# Altium PCB PCMCIA_1.PcbDoc
Units mil, origin at the board's own origin, x right, y up, seen from the top; angles counter-clockwise.
Board outline 6000 x 4000 mil, 2 copper layers (Top Layer, Bottom Layer); 3 components, 48 nets, 170 pads, 14 vias.
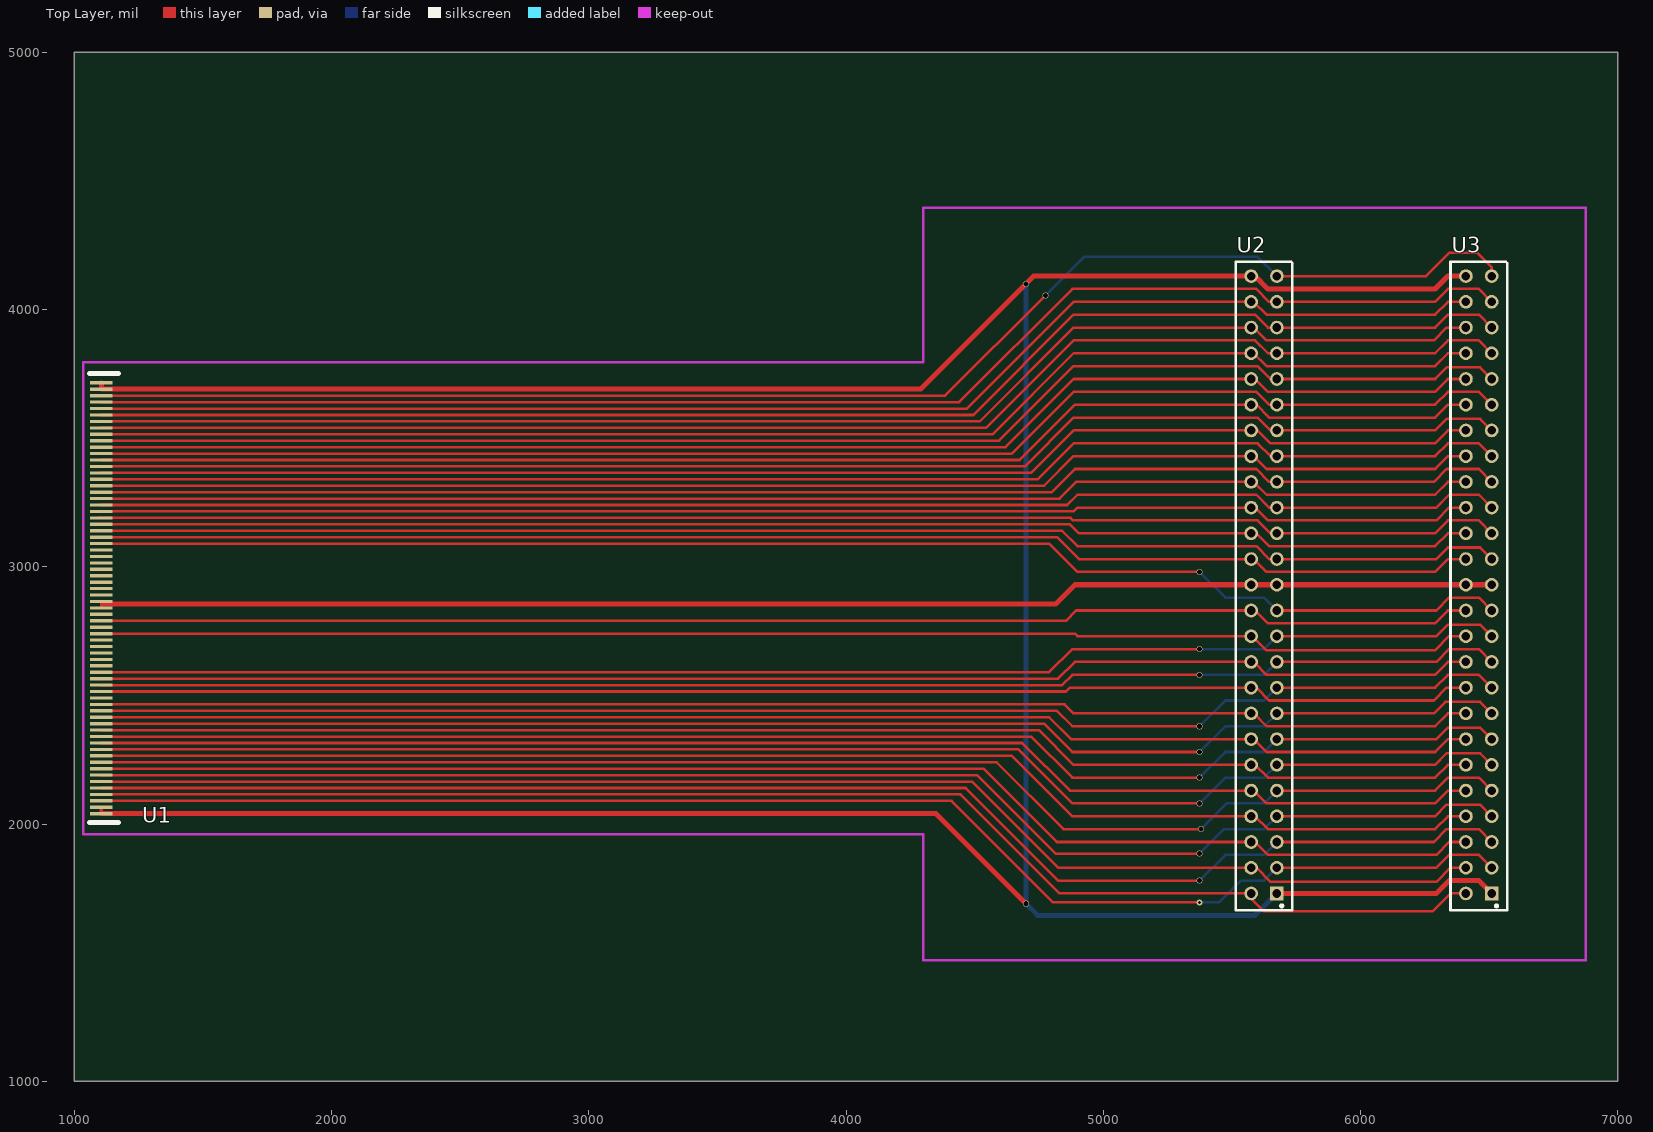
[diagram p0: Top Layer view]
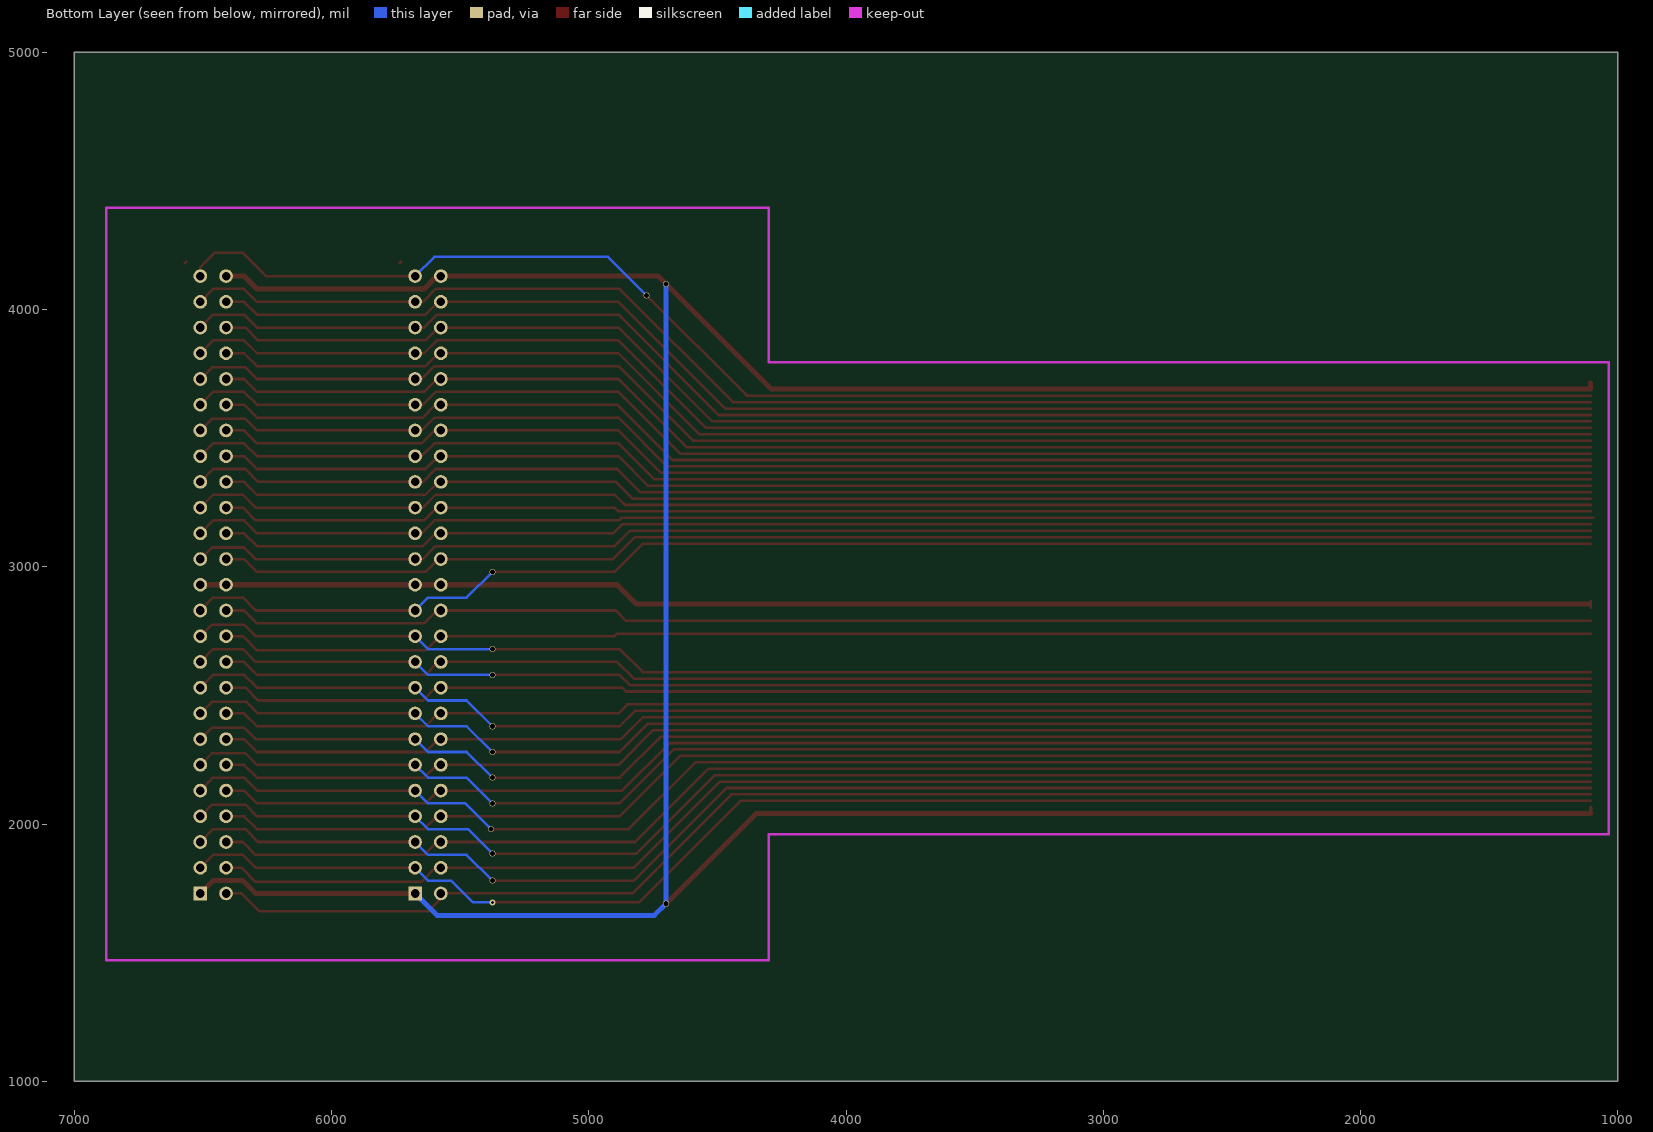
[diagram p1: Bottom Layer view, seen from below]

## Layer stack, top to bottom
Top Layer: signal copper 1.4
Dielectric: dielectric 12.6, FR-4, Dk 4.8
Bottom Layer: signal copper 1.4

## Board outline
1000,1000 7000,1000 7000,5000 1000,5000

## Design rules (kind name [scope] priority, off if disabled: settings)
Clearance [All] p1: gap=10
ComponentClearance [All] p1: gap=10 collisioncheckmode=3 verticalgap=10
HoleSize [All] p1: absolutevalues=TRUE maxlimit=35.43 minlimit=3.94 maxpercent=80.000 minpercent=20.000
PolygonConnect [All] p1: connectstyle=Relief reliefconductorwidth=10 reliefentries=4 polygonreliefangle="90 Angle"
RoutingVias [All] p1: holewidth=11.81 width=31.5 viastyle="Through Hole" minholewidth=3.94 minwidth=21.65 maxholewidth=19.68 maxwidth=23.62
SolderMaskExpansion [All] p1: expansion=4
TestPointUsage [All] p1: valid=0 allowmultiple=FALSE
Testpoint [All] p1: side=15 testpointundercomponent=TRUE minsize=40 maxsize=100 preferedsize=60 minholesize=0 maxholesize=40 preferedholesize=32 testpointgrid=1 style=1023 order=0-112345678
Width [All] p1: maxlimit=20 minlimit=10 preferedwidth=10
17 further rules are at their usual default settings.

## Components (designator, comment, footprint, x,y, rotation, side; value= is the part's Value field where it differs from the comment)
U1 "" PCMCIA_68pin_F 1105,2040 r180 top
U2 "" DIP40_600MIL 5375,2680 r180 top
U3 "" DIP40_600MIL 6210,2680 r180 top

## Footprints (in the part's own frame and the unit in brackets; to place one, negate y for a bottom-side part, rotate by r counter-clockwise, add the part's x,y. Pads: shape width x height; smd on the part's side, far side on the other; paste and mask are expansions set on the pad)
DIP40_600MIL [mm]
  rect 1.35x1.35 hole 0.85: 1(-7.62,24.13)
  round 1.35 hole 0.85: 2(-7.62,21.59) 3(-7.62,19.05) 4(-7.62,16.51) 5(-7.62,13.97) 6(-7.62,11.43) 7(-7.62,8.89) 8(-7.62,6.35) 9(-7.62,3.81) 10(-7.62,1.27) 11(-7.62,-1.27) 12(-7.62,-3.81) 13(-7.62,-6.35) 14(-7.62,-8.89) 15(-7.62,-11.43) 16(-7.62,-13.97) 17(-7.62,-16.51) 18(-7.62,-19.05) 19(-7.62,-21.59) 20(-7.62,-24.13) 21(-7.62,-26.67) 22(-7.62,-29.21) 23(-7.62,-31.75) 24(-7.62,-34.29) 25(-7.62,-36.83) 26(-5.08,24.13) 27(-5.08,21.59) 28(-5.08,19.05) 29(-5.08,16.51) 30(-5.08,13.97) 31(-5.08,11.43) 32(-5.08,8.89) 33(-5.08,6.35) 34(-5.08,3.81) 35(-5.08,1.27) 36(-5.08,-1.27) 37(-5.08,-3.81) 38(-5.08,-6.35) 39(-5.08,-8.89) 40(-5.08,-11.43) 41(-5.08,-13.97) 42(-5.08,-16.51) 43(-5.08,-19.05) 44(-5.08,-21.59) 45(-5.08,-24.13) 46(-5.08,-26.67) 47(-5.08,-29.21) 48(-5.08,-31.75) 49(-5.08,-34.29) 50(-5.08,-36.83)
  Top Layer lines w0.254: -9.017,-38.227 -9.144,-38.1
  silkscreen extent -9.14,-38.23 -3.56,25.78
PCMCIA_68pin_F [mil]
  rect 86.61x12.5 smd: 1(0,0) 1(0,0) 2(0,-50) 3(0,-100) 4(0,-150) 5(0,-200) 6(0,-250) 7(0,-300) 8(0,-350) 9(0,-400) 10(0,-450) 11(0,-500) 12(0,-550) 13(0,-600) 14(0,-650) 15(0,-700) 16(0,-750) 17(0,-800) 18(0,-850) 19(0,-900) 20(0,-950) 21(0,-1000) 22(0,-1050) 23(0,-1100) 24(0,-1150) 25(0,-1200) 26(0,-1250) 27(0,-1300) 28(0,-1350) 29(0,-1400) 30(0,-1450) 31(0,-1500) 32(0,-1550) 33(0,-1600) 34(0,-1650) 35(0,-25) 35(0,-25) 36(0,-75) 37(0,-125) 38(0,-175) 39(0,-225) 40(0,-275) 41(0,-325) 42(0,-375) 43(0,-425) 44(0,-475) 45(0,-525) 46(0,-575) 47(0,-625) 48(0,-675) 49(0,-725) 50(0,-775) 51(0,-825) 52(0,-875) 53(0,-925) 54(0,-975) 55(0,-1025) 56(0,-1075) 57(0,-1125) 58(0,-1175) 59(0,-1225) 60(0,-1275) 61(0,-1325) 62(0,-1375) 63(0,-1425) 64(0,-1475) 65(0,-1525) 66(0,-1575) 67(0,-1625) 68(0,-1675)
  silkscreen extent -66,-1711 45,35

## Part data
U1: library part Ultrasonic
U2 U3: library part AT89S52_1

## Via types
v1: diameter 23.62, hole 19.68, Top Layer to Bottom Layer, 13 vias
v2: diameter 23.62, hole 11.81, Top Layer to Bottom Layer, 1 vias

## Nets (pads, with @x,y where several pads share a name; then routed paths per layer and width w, separated by ;. In a path a pad name is that pad's centre, name@x,y a point inside that pad or via, vN(x,y) a via of type N, cw(c..) or ccw(c..) an arc to the next point about the centre after c; other vN are vias at no path point)
3.3V: U1.17 U1.51 U2.13 U2.38 U3.13 U3.38 | length 5479.4
  Top Layer w10: U1.17 U1.51 1115,2855 U1.17@1105,2845
  Top Layer w19.68: 1115,2855 4815,2855 4890,2930 U3.13
A0: U1.29 U2.20 U3.20 | length 5566.5
  Top Layer w10: U1.29 4645,3440 4885,3680 5595,3680 5645,3630 6290,3630 6340,3680 6460,3680 U3.20
A1: U1.28 U2.19 U3.19 | length 5541.7
  Top Layer w10: U1.28 4695,3390 4885,3580 5600,3580 5650,3530 6290,3530 6335,3575 6465,3575 U3.19
A2: U1.27 U2.18 U3.18 | length 5525.1
  Top Layer w10: U1.27 4745,3340 4885,3480 5600,3480 5650,3430 6290,3430 6340,3480 6460,3480 U3.18
A3: U1.26 U2.17 U3.17 | length 5504.4
  Top Layer w10: U1.26 4800,3290 4890,3380 5595,3380 5645,3330 6285,3330 6335,3380 6460,3380 U3.17
A4: U1.25 U2.16 U3.16 | length 5483.7
  Top Layer w10: U1.25 4860,3240 4900,3280 5595,3280 5645,3230 6295,3230 6345,3280 6460,3280 U3.16
A5: U1.24 U2.15 U3.15 | length 5481.3
  Top Layer w10: U1.24@1095,3190 4873.23,3190 4883.23,3180 5600,3180 5650,3130 6290,3130 6340,3180 6460,3180 U3.15
A6: U1.23 U2.14 U3.14 | length 5487.8
  Top Layer w10: U1.23 4840,3140 4900,3080 5595,3080 5645,3030 6295,3030 6340,3075 6465,3075 U3.14
A7: U1.22 U2.12 U3.12 | length 5554.1
  Top Layer w10: U1.22 4790,3090 4900,2980 v1(5375,2980) ; U2.12 6295,2830 6345,2880 6460,2880 U3.12
  Bottom Layer w10: v1(5375,2980) 5475,2880 5625,2880 U2.12
A8: U1.12 U2.11 U3.11 | length 5500.3
  Top Layer w10: U1.12 4790,2590 4880,2680 v1(5375,2680) ; U2.11 6295,2730 6340,2775 6465,2775 U3.11
  Bottom Layer w10: v1(5375,2680) 5625,2680 U2.11
A9: U1.11 U2.10 U3.10 | length 5483.7
  Top Layer w10: U1.11 4840,2540 4880,2580 v1(5375,2580) ; U2.10 6295,2630 6345,2680 6460,2680 U3.10
  Bottom Layer w10: v1(5375,2580) 5625,2580 U2.10
A10: U1.8 U2.8 U3.8 | length 5550
  Top Layer w10: U1.8 4770,2390 4880,2280 v1(5375,2280) ; U2.8 6285,2430 6330,2475 6465,2475 U3.8
  Bottom Layer w10: v1(5375,2280) 5475,2380 5625,2380 U2.8
CD1: U1.36 U2.26 U3.26 | length 5554.2
  Top Layer w10: U1.36 4445,2115 4830,1730 U2.26 5575,1710 5625,1660 6280,1660 6350,1730 U3.26@6430,1730
CD2: U1.67 U2.25 U3.25 | length 5754.8
  Top Layer w10: U1.67 4385,3665 v1(4775,4055) ; U2.25 6255,4130 6345,4220 6455,4220 6510,4165 U3.25
  Bottom Layer w10: v1(4775,4055) 4925,4205 5600,4205 U2.25
CS0: U1.7 U2.7 U3.7 | length 5570.7
  Top Layer w10: U1.7 4720,2340 4880,2180 v1(5375,2180) ; U2.7 6295,2330 6340,2375 6465,2375 U3.7
  Bottom Layer w10: v1(5375,2180) 5475,2280 5625,2280 U2.7
CS1: U1.42 U2.32 U3.32 | length 5381.6
  Top Layer w10: U1.42 4790,2415 4875,2330 5585,2330 5635,2280 6290,2280 6340,2330 U3.32
CSLE: U1.56 U2.39 U3.39 | length 5381.6
  Top Layer w10: U1.56 4820,3115 4905,3030 5585,3030 5635,2980 6290,2980 6340,3030 U3.39
D0: U1.30 U2.21 U3.21 | length 5583.1
  Top Layer w10: U1.30 4595,3490 4885,3780 5600,3780 5650,3730 6290,3730 6335,3775 6465,3775 U3.21
D1: U1.31 U2.22 U3.22 | length 5608
  Top Layer w10: U1.31 4545,3540 4885,3880 5590,3880 5640,3830 6290,3830 6340,3880 6460,3880 U3.22
D2: U1.32 U2.23 U3.23 | length 5628.7
  Top Layer w10: U1.32 4495,3590 4885,3980 5590,3980 5640,3930 6290,3930 6340,3980 6460,3980 U3.23
D3: U1.2 U2.2 U3.2 | length 5666
  Top Layer w10: U1.2 4410,2090 4805,1695 v2(5375,1695) ; U2.2 6295,1830 6345,1880 6460,1880 U3.2
  Bottom Layer w10: v2(5375,1695) 5450,1695 5535,1780 5625,1780 U2.2
D4: U1.3 U2.3 U3.3 | length 5657.7
  Top Layer w10: U1.3 4465,2140 4825,1780 v1(5375,1780) ; U2.3 6285,1930 6335,1980 6460,1980 U3.3
  Bottom Layer w10: v1(5375,1780) 5475,1880 5625,1880 U2.3
D5: U1.4 U2.4 U3.4 | length 5628.7
  Top Layer w10: U1.4 4510,2190 4815,1885 v1(5375,1885) ; U2.4 6290,2030 6335,2075 6465,2075 U3.4
  Bottom Layer w10: v1(5375,1885) 5470,1980 5625,1980 U2.4
D6: U1.5 U2.5 U3.5 | length 5616.2
  Top Layer w10: U1.5 4585,2240 4845,1980 v1(5380,1980) ; U2.5 6290,2130 6340,2180 6460,2180 U3.5
  Bottom Layer w10: v1(5380,1980) 5480,2080 5625,2080 U2.5
D7: U1.6 U2.6 U3.6 | length 5591.4
  Top Layer w10: U1.6 4670,2290 4880,2080 v1(5375,2080) ; U2.6 6290,2230 6335,2275 6465,2275 U3.6
  Bottom Layer w10: v1(5375,2080) 5475,2180 5625,2180 U2.6
D8: U1.64 U2.47 U3.47 | length 5476.9
  Top Layer w10: U1.64 4570,3515 4885,3830 5585,3830 5635,3780 6290,3780 6340,3830 U3.47
D9: U1.65 U2.48 U3.48 | length 5497.6
  Top Layer w10: U1.65 4520,3565 4885,3930 5585,3930 5635,3880 6285,3880 6335,3930 U3.48
D10: U1.66 U2.49 U3.49 | length 5518.3
  Top Layer w10: U1.66 4470,3615 4885,4030 5585,4030 5635,3980 6290,3980 6340,4030 U3.49
D11: U1.37 U2.27 U3.27 | length 5489.3
  Top Layer w10: U1.37 4490,2165 4825,1830 5595,1830 5650,1775 6295,1775 6350,1830 U3.27
D12: U1.38 U2.28 U3.28 | length 5464.5
  Top Layer w10: U1.38 4535,2215 4820,1930 5590,1930 5640,1880 6295,1880 6345,1930 U3.28
D13: U1.39 U2.29 U3.29 | length 5443.8
  Top Layer w10: U1.39 4645,2265 4880,2030 5590,2030 5640,1980 6290,1980 6340,2030 U3.29
D14: U1.40 U2.30 U3.30 | length 5426
  Top Layer w10: U1.40 4685,2315 4870,2130 U2.30 5575,2125 5590,2125 5635,2080 6290,2080 6340,2130 U3.30
D15: U1.41 U2.31 U3.31 | length 5402.3
  Top Layer w10: U1.41 4750,2365 4885,2230 5590,2230 5640,2180 6290,2180 6340,2230 U3.31
GND: U1.1 U1.34 U1.35 U1.68 U2.1 U2.50 U3.1 U3.50 | length 13618.5
  Top Layer w13: U1.1@1105,2040 U1.35@1105,2065
  Top Layer w19.68: U1.1@1105,2040 4350,2040 v1(4700,1690) ; U1.68@1106.09,3715 U1.68 1105,3691.09 4291.09,3691.09 4730,4130 U2.50 ; U2.50@5590,4130 5640,4080 6290,4080 6340,4130 U3.50 ; U2.1 6295,1730 6345,1780 6460,1780 U3.1
  Bottom Layer w19.68: v1(4700,4100) v1(4700,1690) 4745,1645 5590,1645 U2.1
INPACK: U1.60 U2.43 U3.43 | length 5397
  Top Layer w10: U1.60 4770,3315 4885,3430 U2.43 5575,3425 5590,3425 5635,3380 6290,3380 6340,3430 U3.43
IOIS16: U1.33 U2.24 U3.24 | length 5649.4
  Top Layer w10: U1.33 4440,3640 4880,4080 5595,4080 5645,4030 6290,4030 6340,4080 6460,4080 U3.24
IORD: U1.44 U2.34 U3.34 | length 5352.6
  Top Layer w10: U1.44 4855,2515 4870,2530 5595,2530 5645,2480 6285,2480 6335,2530 U3.34
IOWR: U1.45 U2.35 U3.35 | length 5376.3
  Top Layer w10: U1.45 4825,2565 4890,2630 U2.35 5575,2625 5590,2625 5635,2580 6290,2580 6340,2630 U3.35
OE: U1.9 U2.9 U3.9 | length 5533.4
  Top Layer w10: U1.9 4820,2440 4880,2380 v1(5375,2380) ; U2.9 6290,2530 6340,2580 6460,2580 U3.9
  Bottom Layer w10: v1(5375,2380) 5475,2480 5625,2480 U2.9
REG: U1.61 U2.44 U3.44 | length 5414.8
  Top Layer w10: U1.61 4720,3365 4885,3530 5600,3530 5650,3480 6290,3480 6340,3530 U3.44
REQ: U1.16 U2.37 U3.37 | length 5363
  Top Layer w10: U1.16 4855,2790 4895,2830 5590,2830 5640,2780 6290,2780 6340,2830 U3.37
RESET: U1.58 U2.41 U3.41 | length 5352.6
  Top Layer w10: U1.58 4885,3215 4900,3230 5590,3230 5640,3180 6295,3180 6345,3230 U3.41
SPKR: U1.62 U2.45 U3.45 | length 5435.5
  Top Layer w10: U1.62 4675,3415 4890,3630 5595,3630 5645,3580 6290,3580 6340,3630 U3.45
STSCHG: U1.63 U2.46 U3.46 | length 5456.2
  Top Layer w10: U1.63 4620,3465 4885,3730 5590,3730 5640,3680 6290,3680 6340,3730 U3.46
VS1: U1.43 U2.33 U3.33 | length 5363.8
  Top Layer w10: U1.43 4850,2465 4885,2430 U2.33 5575,2425 5590,2425 5635,2380 6290,2380 6340,2430 U3.33
VS2: U1.57 U2.40 U3.40 | length 5360.9
  Top Layer w10: U1.57 4870,3165 4905,3130 5595,3130 5645,3080 6290,3080 6340,3130 U3.40
WAIT: U1.59 U2.42 U3.42 | length 5373.3
  Top Layer w10: U1.59 4830,3265 4895,3330 5585,3330 5635,3280 6290,3280 6340,3330 U3.42
WR: U1.15 U2.36 U3.36 | length 5357.6
  Top Layer w10: U1.15 4890,2740 4900,2730 U2.36 5575,2725 5585,2725 5635,2675 6290,2675 6345,2730 U3.36
pads on no net: U1.10 U1.13 U1.14 U1.18 U1.19 U1.20 U1.21 U1.46 U1.47 U1.48 U1.49 U1.50 U1.52 U1.53 U1.54 U1.55

## Keep-outs
Keep-Out Layer:
  lines w10: 1035,1960 4300,1960 4300,1470 6875,1470 6875,4395 4300,4395 4300,3795 1035,3795 1035,1960